# Altium PCB BBU-12V 1.2T FR4 20190425.PcbDoc
Units mm, origin at the board's own origin, x right, y up, seen from the top; angles counter-clockwise.
Board outline 137.98 x 30.4 mm, 2 copper layers (Top Layer, Bottom Layer), stack 1.271 mm thick; 81 components, 56 nets, 240 pads, 155 vias.
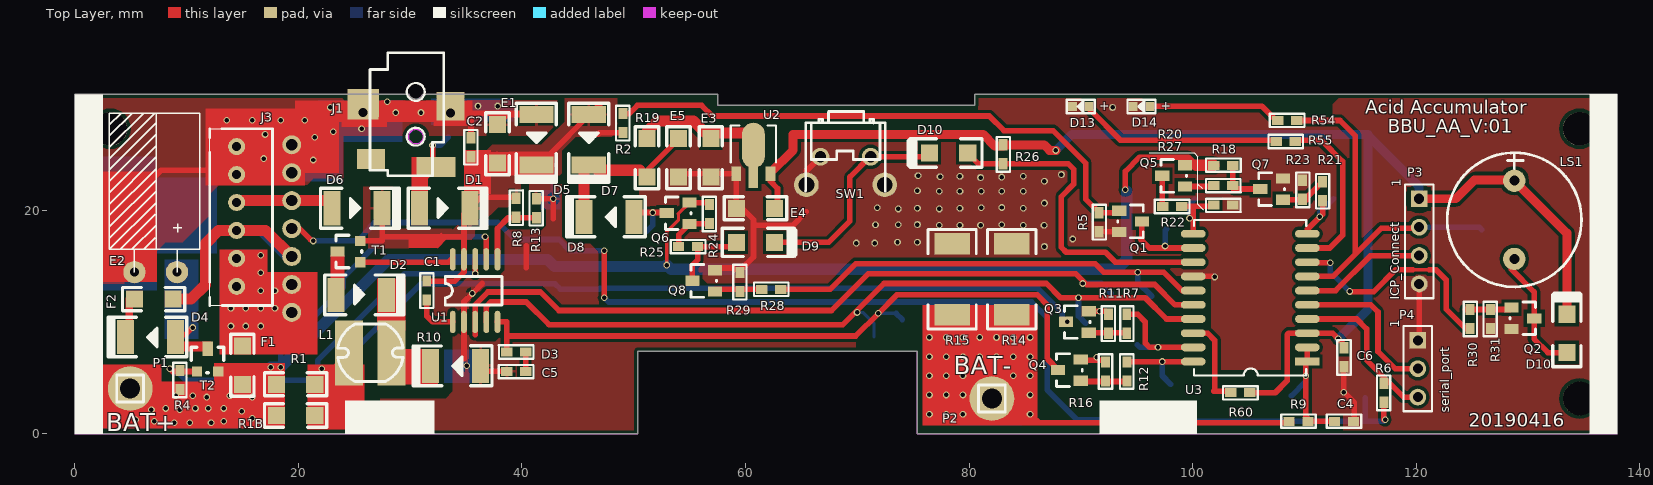
[diagram p0: Top Layer view]
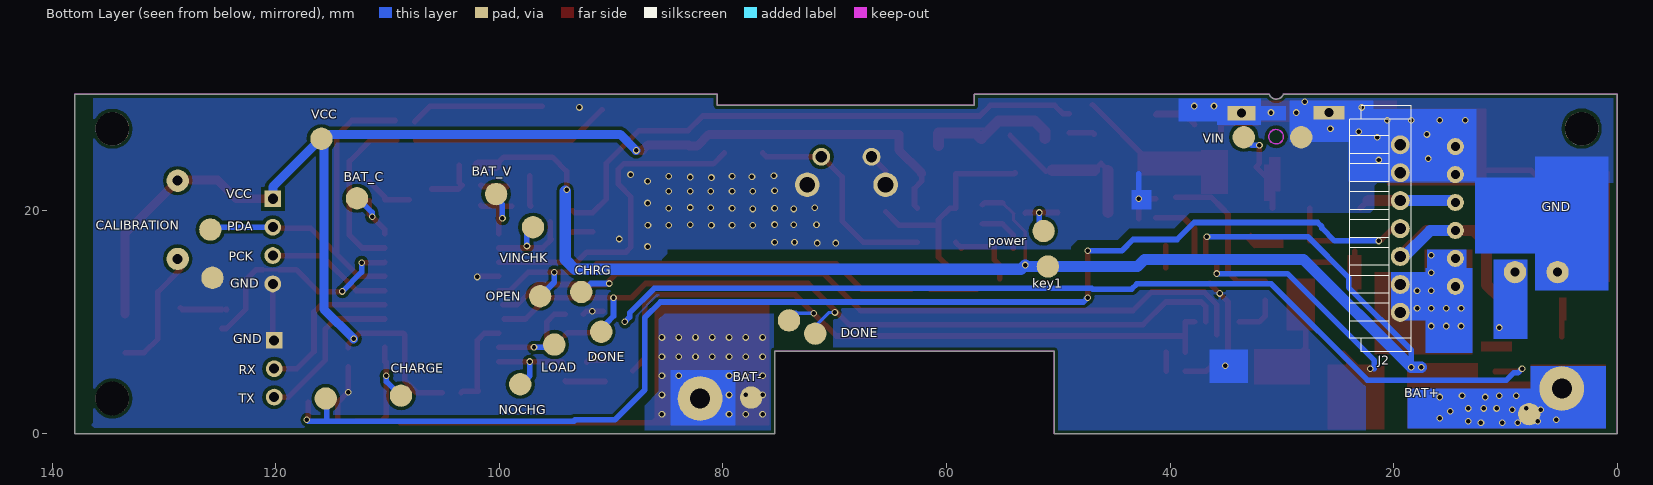
[diagram p1: Bottom Layer view, seen from below]

## Layer stack, top to bottom
Top Solder: solder mask 0.01, Solder Resist, Dk 3.5
Top Layer: signal copper 0.0356
Dielectric 1: dielectric 1.2, FR-4, Dk 4.8
Bottom Layer: signal copper 0.0356
Bottom Solder: solder mask 0.01, Solder Resist, Dk 3.5

## Board outline
0,0 0,30.4 29.875,30.402 ccw(c30.5,30.614) 31.123,30.397 31.148,30.4 57.5,30.4 57.5,29.4 80.5,29.4 80.5,30.4 137.98,30.4 137.98,0 75.38,0 75.38,7.4 50.38,7.4 50.38,0

## Design rules (kind name [scope] priority, off if disabled: settings)
Clearance [All] p1: gap=0.3
PolygonConnect [All] p1: connectstyle=Direct reliefconductorwidth=0.254 reliefentries=4 polygonreliefangle="90 Angle" airgapwidth=0.254
RoutingVias [All] p1: holewidth=0.711 width=1.27 viastyle="Through Hole" minholewidth=0.711 minwidth=1.27 maxholewidth=0.711 maxwidth=1.27
SolderMaskExpansion [All] p1: expansion=0.102
Width [All] p1: maxlimit=5 minlimit=0.254 preferedwidth=0.254 minimp=50.000000 maximp=50.000000 favimp=50.000000
29 further rules are at their usual default settings.

## Components (designator, comment, footprint, x,y, rotation, side; value= is the part's Value field where it differs from the comment)
C1 "100nF" 0603 31.496,12.827 r90 top
C2 "104" 0603 35.433,25.654 r270 top
C4 "0.1uF" 0603 113.538,1.143 r180 top
C5 "220nF" 0603 39.487,5.588 r0 top
C6 "0.1uF" 0603 113.538,6.858 r90 top
D1 "SS34" SMA 30.833,20.193 r90 top
D2 "SS34" SMA 23.368,12.446 r90 top
D3 "SS34" SMA 36.31,6.096 r270 top
D4 "SS34" SMA 9.017,8.675 r270 top
D5 "TVS" SMA 41.285,28.575 r0 top
D6 "1N5401" SMA 22.987,20.193 r90 top
D7 "M7" SMA 45.974,28.575 r0 top
D8 "M7" SMA 50.038,19.431 r270 top
D9 "1N4148" IN4148 59.182,17.145 r0 top
D10 "IN4148" IN4148 79.883,25.146 r180 top
D10 "IN4148" IN4148 133.477,7.283 r90 top
D13 "green_LED" 0603LED 90.74,29.3 r0 top
D14 "red_LED" 0603LED 96.18,29.3 r0 top
E1 "47UF/50V" 1206 37.814,24.257 r90 top
E2 "470UF/25V" RB3.81-GND 9.144,14.478 r90 top
E3 "47UF/16V" 1206 56.896,26.434 r270 top
E4 "47UF/16V" 1206 62.611,20.193 r180 top
E5 "47UF/50V" 1206 54.014,26.434 r270 top
F1 "贴片 30A" 1206 14.986,4.445 r90 top
F2 "贴片 2A" 1206 8.763,12.065 r180 top
J1 "CON4" DC031A 33.6,29.6 r270 top
J2 "out_port" CON7-2.54MM-180-2 19.405,10.875 r90 bottom
J3 "External" XH2.5-6Y 14.478,13.208 r270 top
L1 "33UH/1.5A" CD53 28.321,7.239 r0 top
LS1 "Bell" Buzzer 128.778,15.661 r90 top (schematic designator LS?)
P1 "BAT+" mbig-1 4.953,4.064 r0 top
P2 "BAT-" mbig-1 82.042,3.175 r0 top
P3 "ICP_Connect" HDR1X4 120.269,21.043 r270 top
P4 "serial_port" HDR1X3 120.142,8.382 r270 top
Q1 "SS8050" NPN-SMT 93.43,19.963 r270 top (schematic designator Q4)
Q2 "SS8050" NPN-SMT 128.524,11.308 r270 top
Q3 "S8050" NPN-SMT 90.699,9.066 r90 top
Q4 "SS8050" NPN-SMT 89.992,4.759 r90 top
Q5 "ss8550" PNP-SMT 99.314,22.137 r90 top
Q6 "S8550" PNP-SMT 54.991,18.796 r90 top
Q7 "ss8050" NPN-SMT 108.077,20.955 r90 top
Q8 "SS8050" NPN-SMT 57.277,12.742 r90 top
R1 "0R24/1% 1206" 1206 21.463,4.445 r180 top
R1B "0R24/1% 1206" 1206 21.463,1.651 r180 top
R2 "47K" 0603 49.022,27.813 r270 top
R4 "1M" 0603 9.398,4.826 r270 top
R5 "4.7K" 0603 91.652,18.947 r90 top
R6 "100R" 0603 117.094,3.683 r270 top
R7 "4.7K" 0603 94.117,9.867 r90 top
R8 "1.15M" 0603 39.497,20.244 r90 top
R9 "100R" 0603 109.474,1.143 r180 top
R10 "120R" 0603 39.487,7.327 r180 top
R11 "100k" 0603 92.466,9.867 r270 top
R12 "4.7K" 0603 94.107,5.588 r270 top
R13 "100k" 0603 41.275,20.193 r270 top
R14 "0.01R 3W" 2512 83.82,10.668 r90 top
R15 "0.01R 3W" 2512 78.486,10.668 r90 top
R16 "100K" 0603 92.202,5.588 r90 top
R18 "10K" 0603 102.743,24.042 r180 top
R19 "100R 1/2W" 1206 51.181,23.005 r90 top
R20 "10K" 0603 102.743,22.225 r0 top
R21 "10K" 0603 111.633,21.717 r90 top
R22 "82K 1%" 0603 98.171,20.358 r0 top
R23 "100K" 0603 109.855,21.844 r90 top
R24 "100K" 0603 56.769,19.674 r270 top
R25 "4.7K" 0603 54.864,16.764 r180 top
R26 "10K" 0603 83.058,25.019 r90 top
R27 "36K 1%" 0603 102.743,20.457 r0 top
R28 "4.7K" 0603 62.304,12.944 r180 top
R29 "100K" 0603 59.501,13.589 r270 top
R30 "4.7K" 0603 124.841,10.287 r90 top
R31 "100K" 0603 126.619,10.287 r270 top
R54 "1K" 0603 108.458,28.057 r180 top
R55 "1K" 0603 108.331,26.162 r180 top
R60 "10K" 0603 104.267,3.683 r0 top
SW1 "S1 (ONOFF)" KEYB 66.7,24.8 r0 top locked
T1 "AO3401" SOT23 25.527,15.367 r90 top
T2 "AO3401" SOT23 10.922,5.588 r0 top
U1 "CN3767" CN3767 35.814,12.827 r0 top
U2 "7550" SOT89 62.23,23.28 r180 top
U3 "JYHM1716OCS-20" SOP-20 105.156,12.192 r90 top

## Footprints (in the part's own frame and the unit in brackets; to place one, negate y for a bottom-side part, rotate by r counter-clockwise, add the part's x,y. Pads: shape width x height; smd on the part's side, far side on the other; paste and mask are expansions set on the pad)
0603 [mm]
  rect 1x0.8 smd: 1(-0.85,0.01) 2(0.85,0.01)
  silkscreen extent -1.55,-0.6 1.55,0.59
0603LED [mm]
  rect 0.8x0.8 smd: A(0,0) K(-1.5,0)
  silkscreen extent -2,-0.6 0.5,0.6
1206 [mil]
  rect 60x60 smd: 1(0,0) 2(135,0)
  silkscreen extent -42,-41 177,41
2512 [mm]
  rect 1.905x3.175 smd: 1(0,0) 2(6.35,0)
  silkscreen extent -1.27,-2.16 7.62,2.16
Buzzer [mm]
  round 2 hole 0.9: 1(0,0) 2(7,0)
  silkscreen extent -2.5,-6 9.5,6, body extent -2.5,-6 9.5,6, height 9
CD53 [mm]
  rect 2.5x5.8 smd: 1(0,0) 2(-3.81,0)
  silkscreen extent -4.8,-2.56 1.05,2.61
CN3767 [mm]
  oval 0.5x2 smd: 1(-2,-2.8) 2(-1,-2.8) 3(0,-2.8) 4(1,-2.8) 5(2,-2.8) 6(2,2.8) 7(1,2.8) 8(0,2.8) 9(-1,2.8) 10(-2,2.8)
  silkscreen extent -2.67,-1.27 2.41,1.27
CON7-2.54MM-180-2 [mm]
  round 1.7 hole 1: 1(0,0) 2(2.5,0) 3(5,0) 4(7.5,0) 5(10,0) 6(12.5,0) 7(15,0)
  silkscreen extent -3.5,-1 18.5,4.5
DC031A [mm]
  rect 2x2.5 smd: 1(0,0)
  rect 2.5x2.8 smd: 2(0,-7.8)
  rect 1.8x3.5 smd: 3(5.7,-1.3)
  rect 1.8x2.5 smd: 4(5,-7.1)
  silkscreen extent -4.5,-7.2 6.5,-0.6
HDR1X3 [mm] "Connector; Header; 3 Position"
  rect 1.5x1.5 hole 0.9: 1(0,0)
  round 1.5 hole 0.9: 2(2.54,0) 3(5.08,0)
  silkscreen extent -1.27,-1.27 6.35,1.27
HDR1X4 [mm] "Connector; Header; 4 Position"
  rect 1.5x1.5 hole 0.9: 1(0,0)
  round 1.5 hole 0.9: 2(2.54,0) 3(5.08,0) 4(7.62,0)
  silkscreen extent -1.27,-1.27 8.89,1.27
IN4148 [mil]
  rect 60x60 smd: A(0,0) K(135,0)
  silkscreen extent -50,-50 210,50
KEYB [mm]
  round 2.2 hole 1.4: 0(-1.25,-2.5) 0(5.75,-2.5)
  round 1.6 hole 1: 1(0,0) 2(4.5,0)
  silkscreen extent -1.33,-3.05 5.81,4.04
mbig-1 [mm]
  round 4 hole 1.8: 1(0,0)
  silkscreen extent -1.2,-1.2 1.2,1.2, body extent -1.27,-1.27 1.27,1.27, height 8.54
NPN-SMT [mil]
  rect 36x50 smd: B(0,0) C(38,80) E(75,0)
  silkscreen extent -20,-5 95,85
PNP-SMT [mil]
  rect 36x50 smd: B(0,0) C(38,80) E(75,0)
  silkscreen extent -20,-5 95,85
RB3.81-GND [mm]
  round 2 hole 0.813: 1(0,0) 2(0,3.81)
  silkscreen extent 0,-2.04 14.23,6.05
SMA [mil]
  rect 120x60 smd: A(0,0) K(0,-177.16)
  silkscreen extent -70,-238 70,40
SOP-20 [mm]
  rect 0.7x2.2 smd: 1(-5.715,-5.101)
  oval 0.7x2.2 smd: 2(-4.445,-5.101) 3(-3.175,-5.101) 4(-1.905,-5.101) 5(-0.635,-5.101) 6(0.635,-5.101) 7(1.905,-5.101) 8(3.175,-5.101) 9(4.445,-5.101) 10(5.715,-5.101) 11(5.715,5.101) 12(4.445,5.101) 13(3.175,5.101) 14(1.905,5.101) 15(0.635,5.101) 16(-0.635,5.101) 17(-1.905,5.101) 18(-3.175,5.101) 19(-4.445,5.101) 20(-5.715,5.101)
  silkscreen extent -6.96,-5 6.95,5.03
SOT23 [mil]
  rect 36x36 smd: 1(0,0) 2(75,0)
  rect 36x50 smd: 3(38,80)
  silkscreen extent -20,-5 95,85
SOT89 [mil]
  rect 34x50 smd: 1(120,0) 3(0,0)
  rect 34x100 smd: 2(60,0)
  oval 80x160 smd: 2(60,-100)
  silkscreen extent -20,-170 140,-40
XH2.5-6Y [mil]
  round 60 hole 31.5: 1(-492.13,0) 2(-393.7,0) 3(-295.28,0) 4(-196.85,0) 5(-98.43,0) 6(0,0)
  silkscreen extent -555,-94 67,126

## Part data
C1 C2 C4 C5 C6: library part CAP, "C?"
D1 D2 D3 D4 D5: library part "DIODE SCHOTTKY", "Schottky Diode"
D6 D7 D8 D9 D10 D10: library part DIODE, "D?"
D13 D14: library part LED, "D?"
E1 E2 E3 E4 E5: library part ELECTRO1
F1 F2: library part "Fuse Thermal", "Thermal Fuse"
J1: "Connector"
J2: library part CON7
J3: library part "Header 6", "Header, 6-Pin"
L1: library part INDUCTOR
LS1: "Electrical Bell"
P1 P2: library part "Header 1"
P3: library part "Header 4", "Header, 4-Pin"
P4: library part "Header 3", "Header, 3-Pin"
Q1 Q2 Q3 Q4 Q8: library part NPN_1, "NPN Transistor"
Q5: library part PNP
Q6: library part PNP_1, "PNP Transistor"
Q7: library part NPN, "NPN Transistor"
R1 R1B R2 R4 R5 R6 R7 R8 R9 R10 R11 R12 R13 R14 R15 R16 R19 R22 R24 R25 R26 R27 R28 R29 R30 R31 R54 R55 R60: library part RES2, "R?"
R18 R20 R21 R23: library part RES1
SW1: library part SW-PB, "S?"
T1 T2: library part "MOSFET P"
U2: library part 7533

## Free pads (board coordinates)
  round 3 hole 3 unplated: 0(3.175,27.305) 0(134.62,3.175) 0(134.62,27.305)
  round 2 smd far side: 0(7.874,1.778) 0(28.267,26.543) 0(33.401,26.543) 0(50.927,14.986) 0(51.308,18.161) 0(71.744,8.978) 0(74.089,10.16) 0(77.477,3.261) 0(90.892,9.144) 0(92.67,12.7) 0(95.083,8.001) 0(96.353,12.319) 0(96.988,18.502) 0(98.131,4.445) 0(100.29,21.463) 0(108.799,3.429) 0(112.736,21.082) 0(115.53,3.175) 0(115.911,26.416) 0(125.668,13.97) 0(125.856,18.288)
  rect 2.8x1.2 hole 0.8: 22(25.775,28.754)
  rect 2.5x1.3 hole 0.8: 23(33.624,28.698)

## Via types
v1: diameter 0.6, hole 0.4, Top Layer to Bottom Layer, tented both sides, 155 vias

## Nets (pads, with @x,y where several pads share a name; then routed paths per layer and width w, separated by ;. In a path a pad name is that pad's centre, name@x,y a point inside that pad or via, vN(x,y) a via of type N, cw(c..) or ccw(c..) an arc to the next point about the centre after c; other vN are vias at no path point)
BAT+: F1.1 P1.1 pad.0@7.874,1.778 pad.0@50.927,14.986 Q5.E Q6.E R1.2 R1B.2 R4.2 R18.2 R24.1 T2.2 U1.7 | length 148.4
  Top Layer w0.25: 53.998,19.091 53.998,19.708
  Top Layer w0.3: v1(52.959,15.113) 52.959,18.098 53.952,19.091 ; 53.998,19.708 Q6.E
  Top Layer w0.5: P1.1 7.62,1.397 11.938,1.397 ; 11.811,1.524 11.938,1.397 ; R1.2 F1.1 11.938,1.397 ; v1(36.703,17.653) 36.814,17.542 U1.7 ; Q6.E 56.603,20.701 R24.1 ; v1(93.98,21.844) 93.98,23.495 95.25,24.765 99.607,24.765 100.33,24.042
  Top Layer w1: 100.33,24.042 101.883,24.042 R18.2
  Bottom Layer w0.5: v1(18.415,5.969) 18.415,7.493 24.025,13.103 24.025,13.992 27.686,17.653 v1(36.703,17.653)
  Bottom Layer w1: v1(17.526,5.969) v1(18.415,5.969) 28.067,15.621 42.291,15.621 42.926,14.986 52.832,14.986 v1(52.959,15.113) 53.34,14.732 93.218,14.732 94.107,15.621 v1@94.107,21.717
  other v1: 8.89,1.016 10.287,1.016 12.192,1.016 7.112,1.143 13.335,1.143 5.461,1.27 15.875,1.397 14.938,2.032 6.858,2.159 9.398,2.159 8.128,2.286 10.795,2.286 11.938,2.286 13.335,2.286 11.811,3.302 15.875,3.302 9.017,3.429 10.541,3.429 13.88,3.429
BAT_C: pad.0@112.736,21.082 R21.1 U3.10 | length 5.6
  Top Layer w0.5: U3.10 110.257,18.309 v1(111.379,19.431) 111.623,19.675 R21.1
  Bottom Layer w0.5: v1(111.379,19.431) 111.379,19.822 pad.0@112.6,21.043
BAT_OUT: F1.2 J2.1 J2.2 J3.5 J3.6 | length 17.9
  Top Layer w0.5: J3.5@14.351,16.089 14.351,13.589 19.191,13.589 J2.2 19.685,13.095 19.685,8.001 19.558,7.874 F1.2
  other v1: 13.97,9.652 15.303,9.652 16.637,9.652 13.97,11.239 15.303,11.239 16.637,11.239 17.907,11.239 16.637,12.827 17.907,12.827 16.637,14.414 16.637,16.002
BAT_V: pad.0@100.29,21.463 R22.2 R27.1 U3.11 | length 7.2
  Top Layer w0.5: R22.2@98.894,20.369 99.949,20.369 ; U3.11 100.055,20.263 99.949,20.369 ; R27.1@101.678,20.457 101.59,20.369 99.949,20.369
  Bottom Layer w0.5: v1(99.724,19.304) 99.724,20.536 pad.0@100.203,21.015
BUZZER: R30.1 U3.8 | length 20.7
  Top Layer w0.3: 119.701,14.693 121.153,14.693
  Top Layer w0.5: U3.8 110.302,15.322 v1(112.323,15.322) ; v1(114.046,12.75) 114.055,12.742 116.207,12.742 118.159,14.693 119.701,14.693 ; 121.153,14.693 121.788,14.693 122.682,13.799 122.682,11.176 124.421,9.437 R30.1
  Bottom Layer w0.5: v1(112.323,15.322) 112.323,14.474 v1(114.046,12.75)
CHARGE_I: C4.2 pad.0@108.799,3.429 R9.1 U3.1 U3.2 | length 11.4
  Top Layer w0.5: U3.1@110.13,6.477 110.13,1.581 110.578,1.133 C4.2@112.854,1.133 ; U3.1 U3.2
  Bottom Layer w0.5: pad.0@108.839,3.411 110.108,4.68 v1(110.108,5.207)
CHRG: pad.0@92.67,12.7 U1.3 U3.16 | length 73.1
  Top Layer w0.5: 35.814,8.89 U1.3 35.814,11.557 36.957,12.7 41.656,12.7 43.307,11.049 67.691,11.049 70.993,14.351 89.535,14.351 90.511,13.375 96.607,13.375 98.425,11.557 U3.16@99.695,11.557
  Bottom Layer w0.5: v1(90.17,13.462) 91.821,13.462 pad.0@92.71,12.573
DONE: pad.0@71.744,8.978 pad.0@90.892,9.144 U1.4 U3.17 | length 73.6
  Top Layer w0.5: U1.4 36.814,11.414 37.211,11.811 40.386,11.811 42.418,9.779 68.707,9.779 72.39,13.462 86.919,13.462 88.189,12.192 v1(89.789,12.192) 95.758,12.192 97.663,10.287 U3.17@99.568,10.287
  Bottom Layer w0.3: v1(69.977,10.875) 70.487,10.875 71.501,9.86 pad.0@71.501,8.692
  Bottom Layer w0.5: v1(89.789,12.192) 89.789,10.541 pad.0@90.424,9.906
GND: C2.1 C4.1 C5.1 C6.1 D3.A D5.A D13.K D14.K E1.2 E2.2 E3.2 E4.2 E5.2 J1.1 J1.2 J2.6 J2.7 J3.1 J3.2 P3.4 P4.1 pad.0@28.267,26.543 pad.0@125.668,13.97 pad.22 pad.23 Q1.E Q2.E Q3.E Q4.E Q7.E Q8.E R5.1 R11.1 R13.1 R14.2 R15.2 R16.2 R23.2 R27.2 R29.1 R31.2 SW1.0 SW1.1 U1.2 U2.1 U3.14 | length 89.8
  Top Layer w0.5: E2.2 5.334,21.209 7.714,23.589 J3.2@14.351,23.589 ; pad.23 35.433,28.698 ; 34.814,6.725 U1.2 34.814,11.827 v1(35.56,12.573) 36.449,13.462 ; C2.1 35.443,28.688 35.433,28.698 ; D3.A 36.807,5.598 C5.1 ; E1.2 38.703,28.575 D5.A 41.162,28.698 35.433,28.698 ; 40.386,14.859 40.386,16.831 ; R13.1 v1(42.799,21.043) 42.799,19.244 ; E5.2@53.848,23.368 53.936,23.28 U2.1 E4.2 59.7,20.193 60.716,19.177 60.716,18.669 ; Q8.E@57.277,14.849 58.91,14.849 59.065,14.693 ; R29.1@59.573,14.693 60.716,15.836 60.716,18.669 ; 65.45,19.896 64.223,18.669 60.716,18.669 ; 65.45,23.55 SW1.1 ; Q4.E@90.551,6.604 92.026,6.604 R16.2 ; Q3.E 92.223,10.971 R11.1 ; R5.1 93.391,18.097 Q1.E ; U3.14 101.935,14.097 v1(101.981,14.051) ; C6.1 v1(113.528,3.743) 114.476,2.794 114.476,1.221 C4.1 ; P4.1 120.269,8.509 P3.4@120.269,13.335
  Bottom Layer w0.5: v1(42.799,21.043) 42.799,23.28
  other v1: 35.052,6.096 91.422,6.858 91.694,10.971 86.741,16.764 69.914,17.081 71.565,17.081 73.597,17.145 75.38,17.145 89.281,17.443 77.343,18.669 79.185,18.669 81.026,18.669 84.836,18.669 86.708,18.669 71.628,18.717 73.66,18.711 75.38,18.732 82.932,18.717 73.66,20.129 77.343,20.129 75.38,20.193 79.185,20.193 84.836,20.193 71.784,20.249 81.09,20.249 82.931,20.263 86.741,20.659 77.343,21.717 79.185,21.717 81.09,21.717 82.932,21.717 84.836,21.717 75.38,21.76 86.741,22.606 81.026,22.942 82.931,22.987 77.407,23.005 79.185,23.07 84.836,23.07 75.438,23.114 88.265,23.208 21.336,24.511 16.891,24.638 21.463,26.543 17.018,26.797 23.114,27.051 25.654,27.305 13.589,28.067 15.875,28.067 18.415,28.067 20.574,28.067 28.702,28.754 30.971,28.754 22.86,29.21 92.837,29.21 36.068,29.337 37.846,29.337 27.94,29.718
ICPCK: P3.3 U3.6 | length 11.3
  Top Layer w0.5: U3.6 112.789,12.827 115.89,15.928 P3.3@120.269,15.928
ICPDA: P3.2 pad.0@125.856,18.288 R54.1 U3.7 | length 33.8
  Top Layer w0.5: R54.1 113.183,28.046 114.554,26.675 114.554,16.129 ; U3.7 112.562,14.097 116.88,18.415 P3.2@120.269,18.415
  Bottom Layer w0.5: P3.2 125.641,18.503 pad.0@125.856,18.288
KEY: D10.A@79.883,25.146 R26.1 U3.13 | length 29.9
  Top Layer w0.5: D10.A@79.883,25.146 80.86,24.169 R26.1 88.885,24.169 89.356,23.698 89.356,22.339 88.252,21.235 88.252,16.701 88.697,16.256 92.202,16.256 93.091,15.367 U3.13
LED_C: R55.1 U3.9 | length 15.2
  Top Layer w0.5: R55.1@109.181,26.279 111.516,26.279 113.411,24.384 113.411,17.78 112.268,16.637 U3.9
LOAD: pad.0@95.083,8.001 R7.2 U3.19 | length 10.3
  Top Layer w0.5: R7.2 95.074,10.717 95.758,10.033 95.758,8.128 96.139,7.747 v1(96.901,7.747) U3.19
  Bottom Layer w0.5: pad.0@95.035,8.001 95.289,7.747 v1(96.901,7.747)
NetC1_1: C1.1 U1.1 | length 4
  Top Layer w0.5: C1.1 31.486,10.551 31.999,10.038 33.803,10.038 U1.1
NetC5_2: C5.2 R10.1 | length 1.7
  Top Layer w0.5: C5.2 R10.1
NetD1_A: D1.A J1.3 pad.0@33.401,26.543 | length 8.1
  Top Layer w0.5: D1.A 30.833,22.433 J1.3 32.004,24.196 v1(32.004,25.835)
  Bottom Layer w0.5: v1(32.004,25.835) 32.693,25.835 pad.0@33.401,26.543
NetD2_A: D2.A T1.3 | length 3.9
  Top Layer w0.5: D2.A 23.495,12.573 T1.3
NetD2_K: D2.K D3.K L1.1 | length 5.4
  Top Layer w0.5: D2.K 27.868,7.692 L1.1
NetD4_A: D4.A E2.1 T2.3 | length 7.5
  Top Layer w0.5: D4.A@9.017,8.89 9.906,8.89 v1(10.541,9.525)
  Bottom Layer w0.5: E2.1 10.795,12.827 10.795,9.779 v1(10.541,9.525)
NetD4_K: D4.K F2.2 | length 3.2
  Top Layer w0.5: D4.K@4.953,8.708 F2.2@4.953,11.938
NetD6_A: D6.A J2.5 J3.3 | length 13.9
  Top Layer w0.5: J3.3 J3.3@14.645,20.875 ; D6.A@22.305,20.875 D6.A
  Top Layer w1: J3.3@14.645,20.875 J2.5 D6.A@22.305,20.875
  Bottom Layer w1: J3.3 14.645,20.875 J2.5
NetD7_K: D7.K D8.K E5.1 R19.1 | length 13.9
  Top Layer w0.5: D7.K@45.538,23.567 46.173,24.202 D7.K@46.786,23.589 ; R19.1@50.546,23.589 R19.1@50.64,23.589 ; R19.1@51.1,23.495 E5.1@54.308,26.703
  Top Layer w1: D8.K@45.538,19.812 D7.K@45.538,23.567 ; D7.K@46.786,23.589 R19.1@50.546,23.589
NetD8_A: D8.A pad.0@51.308,18.161 Q6.C | length 4.8
  Top Layer w0.5: D8.A@50.038,19.812 v1(51.689,19.812) 52.908,19.812 Q6.C
  Bottom Layer w0.5: pad.0@51.181,18.161 51.689,18.669 v1(51.689,19.812)
NetD9_A: D9.A Q8.C R25.1 | length 6.6
  Top Layer w0.5: Q8.C@55.245,13.909 55.245,15.113 55.714,15.582 R25.1@55.714,16.627 ; R25.1 D9.A@58.664,16.754 ; D9.A@58.664,16.627 D9.A
NetD9_K: D9.K D10.K@76.454,25.146 SW1.2 | length 19.5
  Top Layer w0.5: D9.K 67.437,17.145 69.342,19.05 69.342,22.987 71.155,24.8 SW1.2 76.108,24.8 D10.K@76.454,25.146
NetD10_A: D10.A@133.477,7.283 LS1.1 Q2.C | length 10.5
  Top Layer w0.5: LS1.1@128.524,14.734 130.556,12.702 Q2.C 130.556,8.509 131.782,7.283 D10.A@133.477,7.283
NetD13_A: D13.A R55.2 | length 17.8
  Top Layer w0.5: D13.A@90.805,29.013 93.54,26.279 R55.2@107.481,26.279
NetD14_A: D14.A R54.2 | length 12
  Top Layer w0.5: D14.A@96.18,29.316 106.193,29.316 R54.2@107.569,27.94
NetE3_1: E3.1 R19.2 U2.2 | length 12.5
  Top Layer w1: R19.2 51.181,27.051 52.126,27.996 55.334,27.996 E3.1 57.386,26.924 60.706,26.924 U2.2@60.706,25.82
NetJ2_4: J2.4 pad.0@115.53,3.175 R6.2 | length 115.9
  Top Layer w0.5: J2.4 20.106,18.375 v1@21.082,17.399 ; v1(47.371,12.192) v1(47.371,16.383) ; v1@117.104,1.27 R6.2
  Bottom Layer w0.5: v1(21.336,17.272) 25.274,17.272 26.416,18.414 26.416,18.542 26.797,18.923 37.846,18.923 39.37,17.399 43.308,17.399 44.324,16.383 v1(47.371,16.383) ; v1(47.371,12.192) 47.752,11.811 85.598,11.811 86.995,10.414 86.995,3.937 89.662,1.27 93.218,1.27 93.345,1.143 115.316,1.143 ; pad.0@115.443,3.221 115.443,1.27 115.316,1.143 ; v1@117.104,1.143 115.316,1.143
  other v1: 117.221,1.27
NetL1_2: L1.2 R1.1 R1B.1 U1.8 | length 28.3
  Top Layer w0.5: L1.2@24.511,6.985 24.003,6.477 24.003,4.445 21.717,4.445 L1.2 ; v1(35.814,14.351) U1.8
  Bottom Layer w0.5: 21.717,5.842 21.717,6.557 29.511,14.351 v1(35.814,14.351)
  other v1: 22.098,5.842
NetP2_1: P2.1 pad.0@77.477,3.261 R9.2 R14.1 R15.1 | length 23.4
  Top Layer w0.5: 85.725,1.524 86.243,1.006 R9.2@108.878,1.006
  other v1: 76.454,1.778 76.454,1.778 77.954,1.778 79.454,1.778 85.454,1.778 76.454,3.492 76.454,3.492 77.954,3.492 79.454,3.492 85.454,3.492 76.454,5.207 76.454,5.207 77.954,5.207 79.454,5.207 83.954,5.207 85.454,5.207 76.454,6.921 76.454,6.921 77.954,6.921 79.454,6.921 80.954,6.921 82.454,6.921 83.954,6.921 85.454,6.921 76.454,8.636 76.454,8.636 77.954,8.636 79.454,8.636 80.954,8.636 82.454,8.636 83.954,8.636 85.454,8.636
NetQ1_B: Q1.B R2.1 R5.2 | length 50.6
  Top Layer w0.5: R2.1 49.603,28.663 50.333,29.393 56.078,29.393 57.023,28.448 81.809,28.448 83.117,27.14 87.516,27.14 90.424,24.232 90.424,21.015 R5.2 93.264,19.797 Q1.B
NetQ2_B: Q2.B R30.2 R31.1 | length 3.8
  Top Layer w0.5: 124.392,11.137 R30.2@124.47,11.137 ; R30.2 128.353,11.137 Q2.B
NetQ3_B: Q3.B R7.1 R11.2 | length 3.5
  Top Layer w0.5: Q3.B 93.902,9.066 R7.1@94.117,8.851
NetQ3_C: Q3.C R4.1 T2.1 | length 88.5
  Top Layer w0.5: v1(8.509,5.842) 8.763,5.588 T2.1
  Bottom Layer w0.5: v1(8.509,5.842) 8.89,5.461 9.271,5.461 9.906,4.826 22.352,4.826 30.949,13.423 42.965,13.423 43.434,12.954 46.931,12.954 47.019,13.042 86.139,13.042 88.35,10.831 88.35,10.456 v1(88.773,10.033)
NetQ4_B: Q4.B R12.2 R16.1 | length 3.6
  Top Layer w0.5: Q4.B@90.551,4.699 94.078,4.699 R12.2
NetQ4_C: pad.0@74.089,10.16 Q4.C R10.2 U1.5 | length 62.5
  Top Layer w0.5: U1.5 38.625,10.027 38.637,10.038 R10.2 ; 38.637,8.763 69.85,8.763 v1(71.882,10.795) 73.533,12.446 86.106,12.446 86.995,11.557 86.995,6.731 Q4.C@88.062,5.664
  Bottom Layer w0.3: v1(71.882,10.795) pad.0@73.478,10.795
  Bottom Layer w0.5: pad.0@73.478,10.795 pad.0@74.032,10.241
NetQ5_B: Q5.B R20.1 | length 2.4
  Top Layer w0.5: Q5.B 101.541,22.137 R20.1@101.639,22.235
NetQ5_C: Q5.C R22.1 | length 2.8
  Top Layer w0.5: R22.1@97.194,20.369 97.282,20.457 Q5.C
NetQ6_B: Q6.B R24.2 R25.2 | length 4.4
  Top Layer w0.5: R25.2@54.014,16.627 54.014,17.819 Q6.B 56.751,18.796 R24.2
NetQ7_B: Q7.B R21.2 R23.1 | length 4.3
  Top Layer w0.5: Q7.B 110.218,20.955 110.257,20.994 110.257,21.201 R21.2
NetQ7_C: Q7.C R18.1 R20.2 | length 4.7
  Top Layer w0.5: R18.1 103.593,22.489 103.339,22.235 103.654,21.92 Q7.C
NetQ8_B: Q8.B R28.2 R29.2 | length 4.2
  Top Layer w0.5: Q8.B@57.277,12.944 R28.2@61.454,12.944
NetR8_1: R8.1 R13.2 U1.6 | length 6.5
  Top Layer w0.5: U1.6@37.814,15.754 37.814,18.383 38.774,19.343 R13.2
NetR60_1: R60.1 U3.18 | length 8.4
  Top Layer w0.5: U3.18 101.34,9.017 101.981,8.376 101.981,3.908 101.893,3.82 103.29,3.82 R60.1
NetT1_1: T1.1 U1.10 | length 8.4
  Top Layer w0.5: T1.1 33.427,15.367 U1.10@33.814,15.754
NOCHG: pad.0@98.131,4.445 R12.1 U3.20 | length 8
  Top Layer w0.5: R12.1@94.361,6.477 v1(97.282,6.477) U3.20
  Bottom Layer w0.5: v1(97.282,6.477) 97.282,5.207 pad.0@98.044,4.445
OPEN: pad.0@96.353,12.319 R28.1 U3.15 | length 41.5
  Top Layer w0.5: R28.1@63.154,12.944 67.576,12.944 69.873,15.24 91.274,15.24 92.036,14.478 97.409,14.478 99.06,12.827 U3.15
  Bottom Layer w0.5: v1(95.087,14.478) 95.087,13.579 pad.0@96.347,12.319
POW_OUT: F2.1 J2.3 J3.4 | length 22.2
  Top Layer w1: F2.1 10.4,12.065 11.684,13.349 11.684,17.018 12.874,18.208 J3.4 17.072,18.208 J2.3
  Bottom Layer w1: J3.4 16.717,18.208 19.05,15.875 J2.3
RXD: P4.2 U3.5 | length 14.3
  Top Layer w0.5: U3.5 115.951,11.557 116.586,10.922 116.586,7.366 118.11,5.842 P4.2
TXD: P4.3 R6.1 U3.4 | length 14.8
  Top Layer w0.5: U3.4 114.681,10.287 115.57,9.398 115.57,6.604 118.872,3.302 P4.3 P4.3@120.435,3.009
VCC: C6.2 D10.K@133.477,10.712 E4.1 LS1.2 P3.1 pad.0@115.911,26.416 R26.2 R60.2 U2.3 U3.3 | length 124.2
  Top Layer w0.5: U2.3 62.23,22.606 62.865,21.971 62.865,20.447 E4.1 ; R60.2 107.393,3.693 108.458,4.759 108.458,8.89 108.585,9.017 U3.3 112.522,9.017 v1(113.03,8.509) 113.528,8.011 C6.2
  Top Layer w0.8: U2.3 62.23,23.368 64.262,25.4 64.262,26.797 81.26,26.797 82.296,25.761 R26.2@83.048,25.761 ; R26.2 86.708,25.869 87.209,25.368 v1(87.766,25.368) ; P3.1 123.532,21.043 125.222,22.733 128.706,22.733 LS1.2 133.477,17.962 D10.K@133.477,10.712
  Bottom Layer w0.8: v1(87.766,25.368) 87.777,25.368 89.206,26.797 pad.0@115.697,26.797 ; v1(113.03,8.509) 115.697,11.176 115.697,26.67 120.269,22.098 P3.1 P3.1@120.269,20.955
VIN: C1.2 C2.2 D1.K D5.K D6.K D7.A E1.1 R2.2 R8.2 T1.2 U1.9 | length 37
  Top Layer w0.5: T1.2 27.305,17.272 ; 27.487,17.272 D6.K ; 27.559,17.653 34.814,17.653 ; C1.2 33.997,13.677 34.814,14.494 34.814,17.653 ; E1.1@37.338,23.661 E1.1@37.338,24.423 ; R8.2@39.487,21.17 36.31,21.17 D1.K 34.814,19.674 34.814,17.653 ; D5.K 41.546,24.075 46.935,29.464 ; 46.806,26.836 46.933,26.963 R2.2
VINCHK: pad.0@96.988,18.502 Q1.C U3.12 | length 8.1
  Top Layer w0.5: 95.351,17.425 96.139,16.637 U3.12 ; 95.462,17.536 Q1.C
  Bottom Layer w0.5: v1(97.536,16.817) 97.536,18.21 pad.0@97.663,18.337
pads on no net: J1.4

## Polygon pours and split planes (outlines as drawn)
GND on Bottom Layer "Top Layer-No Net" (solid, remove dead copper, pour order 25): 70.129,7.257 70.129,11.938 69.748,11.557 48.514,11.557 47.752,11.557 46.355,12.954 45.886,13.423 31.242,13.423 30.949,13.423 22.352,4.826 22.479,4.699 22.479,0 50.038,0 50.165,-0.127 50.292,0 50.292,7.62
GND on Bottom Layer "Top Layer-No Net" (solid, remove dead copper, pour order 14): 0,30.4 57.33,30.4 57.33,29.696 80.153,29.696 80.153,30.323 80.262,30.4 80.309,30.367 85.598,30.367 85.598,16.51 51.663,16.51 51.156,16.51 42.293,22.768 42.166,22.857 26.211,22.857 25.451,22.857 22.919,24.645 22.792,24.735 16.841,24.735 0.127,24.735 0,24.645
GND on Bottom Layer "Top Layer-No Net" (solid, remove dead copper, pour order 17): 84.963,30.229 84.963,16.146 85.47,15.648 85.47,9.79 85.47,4.182 87.623,2.063 88.256,1.44 88.256,0.568 136.256,0.568 136.509,0.817 136.314,1.009 136.314,30.4
NetP2_1 on Bottom Layer "Top Layer-No Net" (solid, remove dead copper, pour order 20): 86.995,0 86.995,2.538 85.725,3.808 85.725,10.16 85.725,10.247 85.217,10.755 75.438,10.755 75.438,0.058 75.38,0
GND on Bottom Layer "Top Layer-No Net" (solid, remove dead copper, pour order 22): 51.562,16.51 48.895,16.51 48.895,16.764 48.26,17.399 44.704,17.399 44.664,17.399 43.688,18.375 43.648,18.414 39.751,18.414 39.625,18.414 38.227,19.812 22.225,19.812 22.098,19.812 21.844,20.066 21.717,20.193 21.717,22.098 21.717,22.225 21.59,22.352 21.463,22.479 16.002,22.479 0.254,22.479 0,22.733 0,28.067 50.575,28.067 51.562,27.08
GND on Top Layer "Top Layer-No Net" (solid, remove dead copper, pour order 18): 24.003,30.402 24.003,22.86 21.367,22.86 21.082,22.575 20.807,22.3 19.177,22.3 12.902,22.3 12.319,21.717 12.065,21.463 12.065,19.558 10.287,17.78 9.652,17.145 8.255,17.145 8.128,17.145 6.858,15.875 6.35,15.367 6.35,13.843 5.969,13.462 0,13.462 0,30.4
GND on Top Layer "Top Layer-No Net" (solid, remove dead copper, pour order 23): 27.305,0 27.305,3.175 33.147,3.175 33.189,3.175 33.824,3.81 33.824,4.445 33.824,4.487 38.1,8.763 69.85,8.763 69.85,7.4 50.38,7.4 50.38,0
VIN on Top Layer "Top Layer-No Net" (solid, remove dead copper, pour order 21): 25.775,22.098 25.8,22.073 25.8,19.431 25.8,16.739 25.902,16.637 25.913,16.627 28.702,16.627 29.855,16.627 30.5,17.272 30.627,17.399 35.451,17.399 35.49,17.399 35.617,17.526 35.776,17.685 35.776,18.161 35.776,18.192 36.253,18.669 37.875,20.291 39.37,20.291 39.799,20.291 39.878,20.369 39.878,22.225 39.878,22.74 40.259,23.121 40.291,23.153 43.198,23.153 43.379,23.153 43.434,23.208 43.561,23.335 43.561,25.273 43.561,25.322 44.831,26.592 47.117,26.592 48.055,26.592 48.514,27.051 48.514,30.339 43.876,30.339 43.815,30.4 43.815,28.194 43.815,27.94 42.545,26.67 41.738,25.863 39.751,25.863 37.333,25.863 36.743,25.273 34.925,23.455 34.925,18.669 34.195,18.669 33.814,18.288 33.727,18.375 31.077,18.375 28.996,18.375 28.448,18.923 28.448,22.098
GND on Top Layer "Top Layer-No Net" (solid, remove dead copper, pour order 19): 22.098,30.401 22.225,30.274 22.225,26.67 42.037,26.67 42.799,27.432 43.18,27.813 43.18,30.4
GND on Top Layer "Top Layer-No Net" (solid, remove dead copper, pour order 15): 40.666,22.352 40.666,20.524 41.706,20.524 41.91,20.32 42.164,20.066 42.164,19.304 42.164,18.609 41.716,18.161 41.589,18.288 40.005,18.288 38.735,18.288 38.481,18.034 38.481,16.383 38.481,14.637 37.814,13.97 37.687,14.097 34.544,14.097 34.29,13.843 34.124,13.677 32.131,13.677 32.131,10.16 32.264,10.027 33.814,10.027 33.814,4.286 34.544,3.556 34.671,3.429 38.354,3.429 38.862,3.429 39.116,3.683 39.243,3.81 39.243,6.223 37.846,6.223 38.1,6.477 38.1,8.255 35.941,8.255 35.56,8.636 35.814,8.89 35.814,11.557 36.957,12.7 41.656,12.7 43.561,10.795 43.815,11.049 46.863,11.049 46.863,16.256 46.228,16.891 46.101,17.018 44.704,17.018 44.196,17.018 43.688,17.526 43.561,17.653 43.561,22.352
GND on Top Layer "Top Layer-No Net" (solid, remove dead copper, pour order 16): 53.912,26.86 50.704,23.652 50.483,23.431 50.483,19.738 53.775,19.738 54.928,20.89 55.23,20.588 56.843,20.588 56.843,18.888 56.815,18.859 55.055,18.859 54.078,17.882 54.078,16.817 55.933,16.817 56.071,16.954 55.817,16.7 55.817,16.065 55.817,15.811 55.436,15.43 55.309,15.303 55.309,13.972 56.101,13.972 57.087,12.986 57.107,13.007 67.64,13.007 67.998,13.007 70.295,15.303 91.338,15.303 91.846,14.795 92.481,14.16 100.648,14.16 101.615,14.16 101.742,14.033 101.664,13.955 101.664,6.794 101.664,6.297 102.299,5.662 102.376,5.739 110.681,5.739 110.681,13.8 110.32,14.16 111.951,14.16 112.967,14.16 117.285,18.478 117.391,18.372 120.714,18.372 120.714,30.416 120.841,30.543 120.761,30.464 85.408,30.464 80.709,30.464 80.836,30.337 80.836,28.638 56.833,28.638 55.055,26.86 53.912,26.86
GND on Top Layer "Top Layer-No Net" (solid, remove dead copper, pour order 24): 113.411,30.4 112.522,29.511 112.522,9.017 110.49,9.017 110.053,8.58 110.053,2.667 110.053,0.672 110.218,0.508 110.726,0 137.98,0 137.98,30.4

## Keep-outs
Keep-Out Layer:
  circle w0.127: c30.515,26.592 r0.65
  lines w0.1: 31.123,30.397 cw(c30.5,30.614) 29.875,30.402 0,30.4 0,0 50.38,0 50.38,7.4 75.38,7.4 75.38,0 137.98,0 137.98,30.4 80.5,30.4 80.5,29.4 57.5,29.4 57.5,30.4 31.148,30.4

## Other copper
Top Layer:
  rectangle net NetD2_K: 27.051,9.271 29.591,13.918
  rectangle net NetD2_A: 22.856,12.933 24.121,16.002
  rectangle net NetD1_A: 30.099,21.697 31.165,24.778
  rectangle net NetD1_A: 30.586,20.828 31.575,24.095
  rectangle net GND: 19.685,23.335 23.622,29.839
  rectangle net GND: 11.684,22.235 20.574,29.114
  rectangle net NetD4_K: 4.517,10.16 5.207,12.192
  rectangle net GND: 0.635,13.589 7.366,23.495
  rectangle net GND: 23.876,27.458 27.94,28.571
  rectangle net GND: 32.096,27.559 35.415,28.346
  rectangle net GND: 23.457,27.9 35.598,29.841
  region net VIN: 32.452,16.602 33.325,17.475 32.766,18.034 31.893,17.161
  rectangle net VIN: 29.855,16.627 32.385,17.653
  rectangle net NetP2_1: 75.819,0.762 86.106,11.557
  rectangle net VIN: 34.814,21.463 37.211,25.4
  rectangle net VIN: 35.306,23.114 42.926,25.273
  rectangle net NetD2_K: 27.487,4.445 32.512,7.62
  rectangle net NetL1_2: 20.828,0.381 25.908,6.223
  rectangle net NetD4_A: 9.398,7.366 12.192,8.255
  rectangle net BAT_OUT: 17.018,7.112 21.717,14.478
  rectangle net BAT_OUT: 12.954,7.112 17.234,16.51
  rectangle net BAT+: 12.446,4.064 18.796,6.35
  rectangle net BAT+: 7.747,0.508 18.796,4.699
  rectangle net BAT+: 1.016,0.508 7.747,6.223
  rectangle net NetE3_1: 56.152,27.178 58.293,27.432
Bottom Layer:
  rectangle net GND: 33.02,4.572 36.467,7.537
  rectangle net GND: 29.63,28.067 33.274,29.337
  rectangle net GND: 31.877,27.965 39.243,30.004
  rectangle net GND: 21.809,26.144 29.337,29.845
  rectangle net GND: 12.573,22.593 24.025,29.079
  rectangle net BAT_OUT: 13.462,14.351 17.018,16.51
  rectangle net BAT_OUT: 19.558,10.875 20.253,14.478
  rectangle net BAT_OUT: 16.764,10.16 19.558,14.478
  rectangle net BAT_OUT: 12.954,7.239 17.145,14.859
  rectangle net GND: 12.573,22.593 22.098,26.971
  rectangle net NetD4_A: 8.001,8.509 11.049,15.621
  rectangle net NetP2_1: 78.867,0.756 84.709,5.715
  rectangle net GND: 6.604,16.129 12.7,22.943
  rectangle net GND: 41.656,20.066 43.456,21.844
  rectangle net GND: 31.877,27.652 35.814,29.718
  rectangle net GND: 23.876,27.774 28.575,29.608
  rectangle net BAT+: 7.747,0.508 18.753,4.064
  rectangle net BAT+: 1.016,0.508 7.747,6.096
  rectangle net GND: 0.762,12.827 7.366,24.821

## Silkscreen, mask and mechanical layers (free items; w line width, h text height)
Top Overlay:
  rectangle: 24.18,0 32.18,3
  rectangle: 135.5,0 137.98,30.4
  rectangle: 0,0 2.5,30.375
  rectangle: 91.68,0 100.38,3
  lines w0.1: 96.139,25.146 100.126,25.146 100.457,24.815 100.457,20.549 100.94,20.066 ; 100.457,22.479 100.457,22.352 100.838,21.971
  text "+" at 91.642,28.976 h0.8
  text "+" at 97.155,28.956 h0.8
  text "Acid Accumulator" at 115.443,28.663 h1.2
  text "BBU_AA_V:01" at 117.475,26.963 h1.2
  text "1" at 118.618,22.098 h0.8 r90
  text "1" at 118.491,9.525 h0.8 r90
  text "20190416" at 124.714,0.658 h1.2
Bottom Overlay:
  text "VCC" at 116.84,28.194 h0.8
  text "VIN" at 37.084,26.035 h0.8
  text "BAT_V" at 102.489,23.114 h0.8
  text "BAT_C" at 113.919,22.606 h0.8
  text "VCC" at 124.433,21.082 h0.8
  text "GND" at 6.731,19.939 h0.8
  text "CALIBRATION" at 136.124,18.288 h0.8
  text "PDA" at 124.333,18.161 h0.8
  text "power" at 56.261,16.891 h0.8
  text "PCK" at 124.206,15.494 h0.8
  text "VINCHK" at 99.949,15.367 h0.8
  text "CHRG" at 93.234,14.224 h0.8
  text "key1" at 52.324,13.081 h0.8
  text "GND" at 124.079,13.081 h0.8
  text "OPEN" at 101.219,11.938 h0.8
  text "DONE" at 69.469,8.636 h0.8
  text "GND" at 123.825,8.128 h0.8
  text "DONE" at 92.075,6.488 h0.8
  text "LOAD" at 96.266,5.588 h0.8
  text "CHARGE" at 109.728,5.461 h0.8
  text "RX" at 123.317,5.334 h0.8
  text "BAT-" at 79.121,4.699 h0.8
  text "BAT+" at 19.05,3.302 h0.8
  text "TX" at 123.317,2.794 h0.8
  text "NOCHG" at 100.076,1.778 h0.8
Bottom Solder:
  lines w1: 16.002,23.241 17.686,23.241 ; 16.002,25.875 17.686,25.875 ; 20.955,25.4 26.162,25.4 26.924,24.638 51.816,24.638 54.864,27.686 73.279,27.686 77.089,23.876 84.582,23.876 ; 22.288,23.812 23.622,22.479 59.69,22.479 63.5,18.669 72.39,18.669 ; 23.05,20.43 23.876,21.256 ; 25.246,20.43 26.071,21.256 ; 27.441,20.43 28.267,21.256 ; 29.636,20.43 30.462,21.256 ; 31.832,20.43 32.657,21.256 ; 34.027,20.43 34.852,21.256 ; 36.222,20.43 37.048,21.256 ; 38.329,26.289 40.742,28.702 ; 38.417,20.43 39.243,21.256 ; 40.132,19.431 41.656,20.955 ; 41.351,26.289 43.764,28.702 ; 42.799,19.431 44.323,20.955 ; 44.374,26.289 46.787,28.702 ; 45.212,18.288 47.625,20.701 ; 47.396,26.289 49.809,28.702 ; 48.197,18.288 50.609,20.701 ; 50.419,26.289 52.832,28.702 ; 54.165,18.288 56.578,20.701 ; 54.991,23.876 57.404,26.289 ; 57.15,18.415 59.563,20.828 ; 58.102,23.876 60.515,26.289 ; 61.214,23.876 63.627,26.289 ; 76.835,27.686 79.248,25.273 ; 79.629,27.686 82.042,25.273 ; 82.423,27.686 84.836,25.273